# EAGLE board Wannen_Changer (EAGLE 9.6.2)
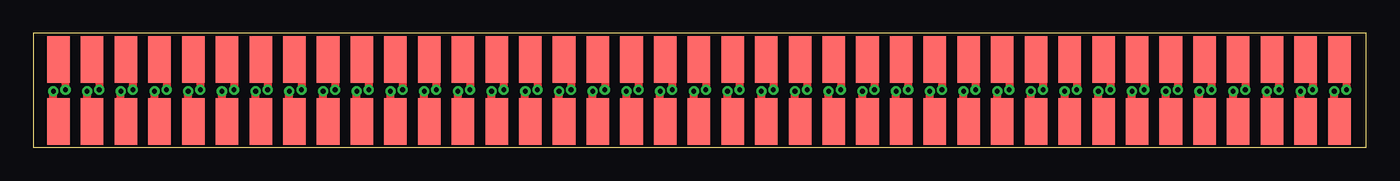
[diagram p0: board, top side]
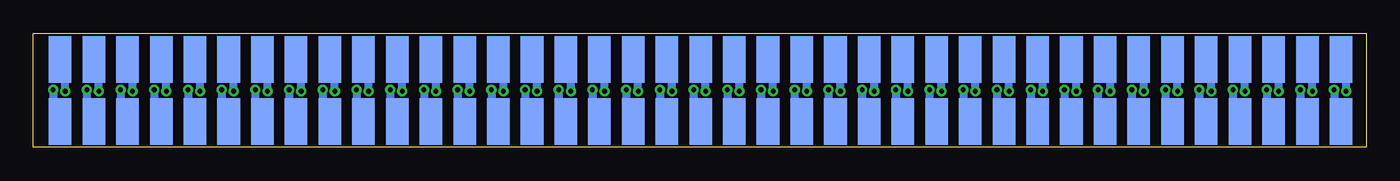
[diagram p1: board, bottom side, seen from below]

Size 100.46 x 8.61 mm. Coordinates in mm from the lower left corner, seen from the top.
Outline: 0,0 100.46,0 100.46,8.61 0,8.61 0,0
Copper layers (1*16): Top 0.035mm / dielectric 1.5mm / Bottom 0.035mm
Design rules "default *": minimum track width 6mil, minimum drill 0.35mm, track to track 6mil, track to pad 6mil, pad to pad 6mil, via to via 6mil, smd to smd 6mil, copper to edge 40mil, drill to drill 6mil, minimum pad ring 10mil, minimum via ring 8mil, stop-mask expansion 4mil, vias tented up to drill 14mil, thermal gap 10mil

## Footprints (pad centres in the part's own frame; a part is rotated, then mirrored left to right if it is on the bottom)
WANNE_D = smd 1.7 x 3.5: 1 0,-6.045 | smd 1.7 x 3.5 bottom: 2 0,-6.045

## Placement (x,y rotation side)
X1  [WANNE_D]  34.93,12.67 0 top
X2  [WANNE_D]  34.93,-4.09 180 bottom
X3  [WANNE_D]  27.3,12.67 0 top
X4  [WANNE_D]  27.3,-4.09 180 bottom
X5  [WANNE_D]  32.39,12.67 0 top
X6  [WANNE_D]  32.39,-4.09 180 bottom
X7  [WANNE_D]  29.84,12.67 0 top
X8  [WANNE_D]  29.84,-4.09 180 bottom
X9  [WANNE_D]  22.22,12.67 0 top
X10  [WANNE_D]  22.22,-4.09 180 bottom
X11  [WANNE_D]  24.76,12.67 0 top
X12  [WANNE_D]  24.76,-4.09 180 bottom
X13  [WANNE_D]  17.14,12.67 0 top
X14  [WANNE_D]  17.14,-4.09 180 bottom
X15  [WANNE_D]  19.68,12.67 0 top
X16  [WANNE_D]  19.68,-4.09 180 bottom
X17  [WANNE_D]  12.06,12.67 0 top
X18  [WANNE_D]  12.06,-4.09 180 bottom
X19  [WANNE_D]  14.61,12.67 0 top
X20  [WANNE_D]  14.61,-4.09 180 bottom
X21  [WANNE_D]  6.99,12.67 0 top
X22  [WANNE_D]  6.99,-4.09 180 bottom
X23  [WANNE_D]  9.53,12.67 0 top
X24  [WANNE_D]  9.53,-4.09 180 bottom
X25  [WANNE_D]  1.91,12.67 0 top
X26  [WANNE_D]  1.91,-4.09 180 bottom
X27  [WANNE_D]  4.45,12.67 0 top
X28  [WANNE_D]  4.45,-4.09 180 bottom
X29  [WANNE_D]  37.47,12.67 0 top
X30  [WANNE_D]  37.47,-4.09 180 bottom
X31  [WANNE_D]  40.01,12.67 0 top
X32  [WANNE_D]  40.01,-4.09 180 bottom
X33  [WANNE_D]  73.02,12.67 0 top
X34  [WANNE_D]  73.02,-4.09 180 bottom
X35  [WANNE_D]  75.56,12.67 0 top
X36  [WANNE_D]  75.56,-4.09 180 bottom
X37  [WANNE_D]  67.94,12.67 0 top
X38  [WANNE_D]  67.94,-4.09 180 bottom
X39  [WANNE_D]  70.48,12.67 0 top
X40  [WANNE_D]  70.48,-4.09 180 bottom
X41  [WANNE_D]  62.87,12.67 0 top
X42  [WANNE_D]  62.87,-4.09 180 bottom
X43  [WANNE_D]  65.41,12.67 0 top
X44  [WANNE_D]  65.41,-4.09 180 bottom
X45  [WANNE_D]  57.79,12.67 0 top
X46  [WANNE_D]  57.79,-4.09 180 bottom
X47  [WANNE_D]  60.33,12.67 0 top
X48  [WANNE_D]  60.33,-4.09 180 bottom
X49  [WANNE_D]  52.71,12.67 0 top
X50  [WANNE_D]  52.71,-4.09 180 bottom
X51  [WANNE_D]  55.25,12.67 0 top
X52  [WANNE_D]  55.25,-4.09 180 bottom
X53  [WANNE_D]  47.62,12.67 0 top
X54  [WANNE_D]  47.62,-4.09 180 bottom
X55  [WANNE_D]  50.16,12.67 0 top
X56  [WANNE_D]  50.16,-4.09 180 bottom
X57  [WANNE_D]  42.55,12.67 0 top
X58  [WANNE_D]  42.55,-4.09 180 bottom
X59  [WANNE_D]  45.09,12.67 0 top
X60  [WANNE_D]  45.09,-4.09 180 bottom
X61  [WANNE_D]  78.1,12.67 0 top
X62  [WANNE_D]  78.1,-4.09 180 bottom
X63  [WANNE_D]  80.64,12.67 0 top
X64  [WANNE_D]  80.64,-4.09 180 bottom
X65  [WANNE_D]  93.34,12.67 0 top
X66  [WANNE_D]  93.34,-4.09 180 bottom
X67  [WANNE_D]  95.88,12.67 0 top
X68  [WANNE_D]  95.88,-4.09 180 bottom
X69  [WANNE_D]  88.27,12.67 0 top
X70  [WANNE_D]  88.27,-4.09 180 bottom
X71  [WANNE_D]  90.8,12.67 0 top
X72  [WANNE_D]  90.8,-4.09 180 bottom
X73  [WANNE_D]  83.18,12.67 0 top
X74  [WANNE_D]  83.18,-4.09 180 bottom
X75  [WANNE_D]  85.72,12.67 0 top
X76  [WANNE_D]  85.72,-4.09 180 bottom
X77  [WANNE_D]  98.42,12.67 0 top
X78  [WANNE_D]  98.42,-4.09 180 bottom

## Library data of the parts
X1-X78 = con-subd

## Nets
N$1: X1.1 X2.1
N$2: X1.2 X2.2
N$3: X3.1 X4.1
N$4: X3.2 X4.2
N$5: X5.1 X6.1
N$6: X5.2 X6.2
N$7: X7.1 X8.1
N$8: X7.2 X8.2
N$9: X9.1 X10.1
N$10: X9.2 X10.2
N$11: X11.1 X12.1
N$12: X11.2 X12.2
N$13: X13.1 X14.1
N$14: X13.2 X14.2
N$15: X15.1 X16.1
N$16: X15.2 X16.2
N$17: X17.1 X18.1
N$18: X17.2 X18.2
N$19: X19.1 X20.1
N$20: X19.2 X20.2
N$21: X21.1 X22.1
N$22: X21.2 X22.2
N$23: X23.1 X24.1
N$24: X23.2 X24.2
N$25: X25.1 X26.1
N$26: X25.2 X26.2
N$27: X27.1 X28.1
N$28: X27.2 X28.2
N$29: X29.1 X30.1
N$30: X29.2 X30.2
N$31: X31.1 X32.1
N$32: X31.2 X32.2
N$33: X33.1 X34.1
N$34: X33.2 X34.2
N$35: X35.1 X36.1
N$36: X35.2 X36.2
N$37: X37.1 X38.1
N$38: X37.2 X38.2
N$39: X39.1 X40.1
N$40: X39.2 X40.2
N$41: X41.1 X42.1
N$42: X41.2 X42.2
N$43: X43.1 X44.1
N$44: X43.2 X44.2
N$45: X45.1 X46.1
N$46: X45.2 X46.2
N$47: X47.1 X48.1
N$48: X47.2 X48.2
N$49: X49.1 X50.1
N$50: X49.2 X50.2
N$51: X51.1 X52.1
N$52: X51.2 X52.2
N$53: X53.1 X54.1
N$54: X53.2 X54.2
N$55: X55.1 X56.1
N$56: X55.2 X56.2
N$57: X57.1 X58.1
N$58: X57.2 X58.2
N$59: X59.1 X60.1
N$60: X59.2 X60.2
N$61: X61.1 X62.1
N$62: X61.2 X62.2
N$63: X63.1 X64.1
N$64: X63.2 X64.2
N$65: X65.1 X66.1
N$66: X65.2 X66.2
N$67: X67.1 X68.1
N$68: X67.2 X68.2
N$69: X69.1 X70.1
N$70: X69.2 X70.2
N$71: X71.1 X72.1
N$72: X71.2 X72.2
N$73: X73.1 X74.1
N$74: X73.2 X74.2
N$75: X75.1 X76.1
N$76: X75.2 X76.2
N$77: X77.1 X78.1
N$78: X77.2 X78.2

## Tracks (layer width: path | path; a pad name or v marks a point on that pad's centre or on a via)
N$1  (via drill 0.35)
  Top 0.305: X1.1 35.45,6.1
  Top 0.61: 35.45,6.1 v35.45,4.35
  Bottom 0.305: 35.45,2.48 X2.1
  Bottom 0.61: v35.45,4.35 35.45,2.48
N$2  (via drill 0.35)
  Top 0.305: X2.2 34.54,2.34
  Top 0.61: 34.54,2.34 v34.54,4.24
  Bottom 0.305: 34.54,6.25 X1.2
  Bottom 0.61: v34.54,4.24 34.54,6.25
N$3  (via drill 0.35)
  Top 0.305: X3.1 27.83,6.1
  Top 0.61: 27.83,6.1 v27.83,4.35
  Bottom 0.305: 27.83,2.48 X4.1
  Bottom 0.61: v27.83,4.35 27.83,2.48
N$4  (via drill 0.35)
  Top 0.305: X4.2 26.92,2.34
  Top 0.61: 26.92,2.34 v26.92,4.24
  Bottom 0.305: 26.92,6.25 X3.2
  Bottom 0.61: v26.92,4.24 26.92,6.25
N$5  (via drill 0.35)
  Top 0.305: X5.1 32.91,6.1
  Top 0.61: 32.91,6.1 v32.91,4.35
  Bottom 0.305: 32.91,2.48 X6.1
  Bottom 0.61: v32.91,4.35 32.91,2.48
N$6  (via drill 0.35)
  Top 0.305: X6.2 32,2.34
  Top 0.61: 32,2.34 v32,4.24
  Bottom 0.305: 32,6.25 X5.2
  Bottom 0.61: v32,4.24 32,6.25
N$7  (via drill 0.35)
  Top 0.305: X7.1 30.37,6.1
  Top 0.61: 30.37,6.1 v30.37,4.35
  Bottom 0.305: 30.37,2.48 X8.1
  Bottom 0.61: v30.37,4.35 30.37,2.48
N$8  (via drill 0.35)
  Top 0.305: X8.2 29.46,2.34
  Top 0.61: 29.46,2.34 v29.46,4.24
  Bottom 0.305: 29.46,6.25 X7.2
  Bottom 0.61: v29.46,4.24 29.46,6.25
N$9  (via drill 0.35)
  Top 0.305: X9.1 22.75,6.1
  Top 0.61: 22.75,6.1 v22.75,4.35
  Bottom 0.305: 22.75,2.48 X10.1
  Bottom 0.61: v22.75,4.35 22.75,2.48
N$10  (via drill 0.35)
  Top 0.305: X10.2 21.84,2.34
  Top 0.61: 21.84,2.34 v21.84,4.24
  Bottom 0.305: 21.84,6.25 X9.2
  Bottom 0.61: v21.84,4.24 21.84,6.25
N$11  (via drill 0.35)
  Top 0.305: X11.1 25.29,6.1
  Top 0.61: 25.29,6.1 v25.29,4.35
  Bottom 0.305: 25.29,2.48 X12.1
  Bottom 0.61: v25.29,4.35 25.29,2.48
N$12  (via drill 0.35)
  Top 0.305: X12.2 24.38,2.34
  Top 0.61: 24.38,2.34 v24.38,4.24
  Bottom 0.305: 24.38,6.25 X11.2
  Bottom 0.61: v24.38,4.24 24.38,6.25
N$13  (via drill 0.35)
  Top 0.305: X13.1 17.67,6.1
  Top 0.61: 17.67,6.1 v17.67,4.35
  Bottom 0.305: 17.67,2.48 X14.1
  Bottom 0.61: v17.67,4.35 17.67,2.48
N$14  (via drill 0.35)
  Top 0.305: X14.2 16.76,2.34
  Top 0.61: 16.76,2.34 v16.76,4.24
  Bottom 0.305: 16.76,6.25 X13.2
  Bottom 0.61: v16.76,4.24 16.76,6.25
N$15  (via drill 0.35)
  Top 0.305: X15.1 20.21,6.1
  Top 0.61: 20.21,6.1 v20.21,4.35
  Bottom 0.305: 20.21,2.48 X16.1
  Bottom 0.61: v20.21,4.35 20.21,2.48
N$16  (via drill 0.35)
  Top 0.305: X16.2 19.3,2.34
  Top 0.61: 19.3,2.34 v19.3,4.24
  Bottom 0.305: 19.3,6.25 X15.2
  Bottom 0.61: v19.3,4.24 19.3,6.25
N$17  (via drill 0.35)
  Top 0.305: X17.1 12.59,6.1
  Top 0.61: 12.59,6.1 v12.59,4.35
  Bottom 0.305: 12.59,2.48 X18.1
  Bottom 0.61: v12.59,4.35 12.59,2.48
N$18  (via drill 0.35)
  Top 0.305: X18.2 11.68,2.34
  Top 0.61: 11.68,2.34 v11.68,4.24
  Bottom 0.305: 11.68,6.25 X17.2
  Bottom 0.61: v11.68,4.24 11.68,6.25
N$19  (via drill 0.35)
  Top 0.305: X19.1 15.13,6.1
  Top 0.61: 15.13,6.1 v15.13,4.35
  Bottom 0.305: 15.13,2.48 X20.1
  Bottom 0.61: v15.13,4.35 15.13,2.48
N$20  (via drill 0.35)
  Top 0.305: X20.2 14.22,2.34
  Top 0.61: 14.22,2.34 v14.22,4.24
  Bottom 0.305: 14.22,6.25 X19.2
  Bottom 0.61: v14.22,4.24 14.22,6.25
N$21  (via drill 0.35)
  Top 0.305: X21.1 7.51,6.1
  Top 0.61: 7.51,6.1 v7.51,4.35
  Bottom 0.305: 7.51,2.48 X22.1
  Bottom 0.61: v7.51,4.35 7.51,2.48
N$22  (via drill 0.35)
  Top 0.305: X22.2 6.6,2.34
  Top 0.61: 6.6,2.34 v6.6,4.24
  Bottom 0.305: 6.6,6.25 X21.2
  Bottom 0.61: v6.6,4.24 6.6,6.25
N$23  (via drill 0.35)
  Top 0.305: X23.1 10.05,6.1
  Top 0.61: 10.05,6.1 v10.05,4.35
  Bottom 0.305: 10.05,2.48 X24.1
  Bottom 0.61: v10.05,4.35 10.05,2.48
N$24  (via drill 0.35)
  Top 0.305: X24.2 9.14,2.34
  Top 0.61: 9.14,2.34 v9.14,4.24
  Bottom 0.305: 9.14,6.25 X23.2
  Bottom 0.61: v9.14,4.24 9.14,6.25
N$25  (via drill 0.35)
  Top 0.305: X25.1 2.43,6.1
  Top 0.61: 2.43,6.1 v2.43,4.35
  Bottom 0.305: 2.43,2.48 X26.1
  Bottom 0.61: v2.43,4.35 2.43,2.48
N$26  (via drill 0.35)
  Top 0.305: X26.2 1.52,2.34
  Top 0.61: 1.52,2.34 v1.52,4.24
  Bottom 0.305: 1.52,6.25 X25.2
  Bottom 0.61: v1.52,4.24 1.52,6.25
N$27  (via drill 0.35)
  Top 0.305: X27.1 4.97,6.1
  Top 0.61: 4.97,6.1 v4.97,4.35
  Bottom 0.305: 4.97,2.48 X28.1
  Bottom 0.61: v4.97,4.35 4.97,2.48
N$28  (via drill 0.35)
  Top 0.305: X28.2 4.06,2.34
  Top 0.61: 4.06,2.34 v4.06,4.24
  Bottom 0.305: 4.06,6.25 X27.2
  Bottom 0.61: v4.06,4.24 4.06,6.25
N$29  (via drill 0.35)
  Top 0.305: X29.1 37.99,6.1
  Top 0.61: 37.99,6.1 v37.99,4.35
  Bottom 0.305: 37.99,2.48 X30.1
  Bottom 0.61: v37.99,4.35 37.99,2.48
N$30  (via drill 0.35)
  Top 0.305: X30.2 37.08,2.34
  Top 0.61: 37.08,2.34 v37.08,4.24
  Bottom 0.305: 37.08,6.25 X29.2
  Bottom 0.61: v37.08,4.24 37.08,6.25
N$31  (via drill 0.35)
  Top 0.305: X31.1 40.53,6.1
  Top 0.61: 40.53,6.1 v40.53,4.35
  Bottom 0.305: 40.53,2.48 X32.1
  Bottom 0.61: v40.53,4.35 40.53,2.48
N$32  (via drill 0.35)
  Top 0.305: X32.2 39.62,2.34
  Top 0.61: 39.62,2.34 v39.62,4.24
  Bottom 0.305: 39.62,6.25 X31.2
  Bottom 0.61: v39.62,4.24 39.62,6.25
N$33  (via drill 0.35)
  Top 0.305: X33.1 73.55,6.1
  Top 0.61: 73.55,6.1 v73.55,4.35
  Bottom 0.305: 73.55,2.48 X34.1
  Bottom 0.61: v73.55,4.35 73.55,2.48
N$34  (via drill 0.35)
  Top 0.305: X34.2 72.64,2.34
  Top 0.61: 72.64,2.34 v72.64,4.24
  Bottom 0.305: 72.64,6.25 X33.2
  Bottom 0.61: v72.64,4.24 72.64,6.25
N$35  (via drill 0.35)
  Top 0.305: X35.1 76.09,6.1
  Top 0.61: 76.09,6.1 v76.09,4.35
  Bottom 0.305: 76.09,2.48 X36.1
  Bottom 0.61: v76.09,4.35 76.09,2.48
N$36  (via drill 0.35)
  Top 0.305: X36.2 75.18,2.34
  Top 0.61: 75.18,2.34 v75.18,4.24
  Bottom 0.305: 75.18,6.25 X35.2
  Bottom 0.61: v75.18,4.24 75.18,6.25
N$37  (via drill 0.35)
  Top 0.305: X37.1 68.47,6.1
  Top 0.61: 68.47,6.1 v68.47,4.35
  Bottom 0.305: 68.47,2.48 X38.1
  Bottom 0.61: v68.47,4.35 68.47,2.48
N$38  (via drill 0.35)
  Top 0.305: X38.2 67.56,2.34
  Top 0.61: 67.56,2.34 v67.56,4.24
  Bottom 0.305: 67.56,6.25 X37.2
  Bottom 0.61: v67.56,4.24 67.56,6.25
N$39  (via drill 0.35)
  Top 0.305: X39.1 71.01,6.1
  Top 0.61: 71.01,6.1 v71.01,4.35
  Bottom 0.305: 71.01,2.48 X40.1
  Bottom 0.61: v71.01,4.35 71.01,2.48
N$40  (via drill 0.35)
  Top 0.305: X40.2 70.1,2.34
  Top 0.61: 70.1,2.34 v70.1,4.24
  Bottom 0.305: 70.1,6.25 X39.2
  Bottom 0.61: v70.1,4.24 70.1,6.25
N$41  (via drill 0.35)
  Top 0.305: X41.1 63.39,6.1
  Top 0.61: 63.39,6.1 v63.39,4.35
  Bottom 0.305: 63.39,2.48 X42.1
  Bottom 0.61: v63.39,4.35 63.39,2.48
N$42  (via drill 0.35)
  Top 0.305: X42.2 62.48,2.34
  Top 0.61: 62.48,2.34 v62.48,4.24
  Bottom 0.305: 62.48,6.25 X41.2
  Bottom 0.61: v62.48,4.24 62.48,6.25
N$43  (via drill 0.35)
  Top 0.305: X43.1 65.93,6.1
  Top 0.61: 65.93,6.1 v65.93,4.35
  Bottom 0.305: 65.93,2.48 X44.1
  Bottom 0.61: v65.93,4.35 65.93,2.48
N$44  (via drill 0.35)
  Top 0.305: X44.2 65.02,2.34
  Top 0.61: 65.02,2.34 v65.02,4.24
  Bottom 0.305: 65.02,6.25 X43.2
  Bottom 0.61: v65.02,4.24 65.02,6.25
N$45  (via drill 0.35)
  Top 0.305: X45.1 58.31,6.1
  Top 0.61: 58.31,6.1 v58.31,4.35
  Bottom 0.305: 58.31,2.48 X46.1
  Bottom 0.61: v58.31,4.35 58.31,2.48
N$46  (via drill 0.35)
  Top 0.305: X46.2 57.4,2.34
  Top 0.61: 57.4,2.34 v57.4,4.24
  Bottom 0.305: 57.4,6.25 X45.2
  Bottom 0.61: v57.4,4.24 57.4,6.25
N$47  (via drill 0.35)
  Top 0.305: X47.1 60.85,6.1
  Top 0.61: 60.85,6.1 v60.85,4.35
  Bottom 0.305: 60.85,2.48 X48.1
  Bottom 0.61: v60.85,4.35 60.85,2.48
N$48  (via drill 0.35)
  Top 0.305: X48.2 59.94,2.34
  Top 0.61: 59.94,2.34 v59.94,4.24
  Bottom 0.305: 59.94,6.25 X47.2
  Bottom 0.61: v59.94,4.24 59.94,6.25
N$49  (via drill 0.35)
  Top 0.305: X49.1 53.23,6.1
  Top 0.61: 53.23,6.1 v53.23,4.35
  Bottom 0.305: 53.23,2.48 X50.1
  Bottom 0.61: v53.23,4.35 53.23,2.48
N$50  (via drill 0.35)
  Top 0.305: X50.2 52.32,2.34
  Top 0.61: 52.32,2.34 v52.32,4.24
  Bottom 0.305: 52.32,6.25 X49.2
  Bottom 0.61: v52.32,4.24 52.32,6.25
N$51  (via drill 0.35)
  Top 0.305: X51.1 55.77,6.1
  Top 0.61: 55.77,6.1 v55.77,4.35
  Bottom 0.305: 55.77,2.48 X52.1
  Bottom 0.61: v55.77,4.35 55.77,2.48
N$52  (via drill 0.35)
  Top 0.305: X52.2 54.86,2.34
  Top 0.61: 54.86,2.34 v54.86,4.24
  Bottom 0.305: 54.86,6.25 X51.2
  Bottom 0.61: v54.86,4.24 54.86,6.25
N$53  (via drill 0.35)
  Top 0.305: X53.1 48.15,6.1
  Top 0.61: 48.15,6.1 v48.15,4.35
  Bottom 0.305: 48.15,2.48 X54.1
  Bottom 0.61: v48.15,4.35 48.15,2.48
N$54  (via drill 0.35)
  Top 0.305: X54.2 47.24,2.34
  Top 0.61: 47.24,2.34 v47.24,4.24
  Bottom 0.305: 47.24,6.25 X53.2
  Bottom 0.61: v47.24,4.24 47.24,6.25
N$55  (via drill 0.35)
  Top 0.305: X55.1 50.69,6.1
  Top 0.61: 50.69,6.1 v50.69,4.35
  Bottom 0.305: 50.69,2.48 X56.1
  Bottom 0.61: v50.69,4.35 50.69,2.48
N$56  (via drill 0.35)
  Top 0.305: X56.2 49.78,2.34
  Top 0.61: 49.78,2.34 v49.78,4.24
  Bottom 0.305: 49.78,6.25 X55.2
  Bottom 0.61: v49.78,4.24 49.78,6.25
N$57  (via drill 0.35)
  Top 0.305: X57.1 43.07,6.1
  Top 0.61: 43.07,6.1 v43.07,4.35
  Bottom 0.305: 43.07,2.48 X58.1
  Bottom 0.61: v43.07,4.35 43.07,2.48
N$58  (via drill 0.35)
  Top 0.305: X58.2 42.16,2.34
  Top 0.61: 42.16,2.34 v42.16,4.24
  Bottom 0.305: 42.16,6.25 X57.2
  Bottom 0.61: v42.16,4.24 42.16,6.25
N$59  (via drill 0.35)
  Top 0.305: X59.1 45.61,6.1
  Top 0.61: 45.61,6.1 v45.61,4.35
  Bottom 0.305: 45.61,2.48 X60.1
  Bottom 0.61: v45.61,4.35 45.61,2.48
N$60  (via drill 0.35)
  Top 0.305: X60.2 44.7,2.34
  Top 0.61: 44.7,2.34 v44.7,4.24
  Bottom 0.305: 44.7,6.25 X59.2
  Bottom 0.61: v44.7,4.24 44.7,6.25
N$61  (via drill 0.35)
  Top 0.305: X61.1 78.63,6.1
  Top 0.61: 78.63,6.1 v78.63,4.35
  Bottom 0.305: 78.63,2.48 X62.1
  Bottom 0.61: v78.63,4.35 78.63,2.48
N$62  (via drill 0.35)
  Top 0.305: X62.2 77.72,2.34
  Top 0.61: 77.72,2.34 v77.72,4.24
  Bottom 0.305: 77.72,6.25 X61.2
  Bottom 0.61: v77.72,4.24 77.72,6.25
N$63  (via drill 0.35)
  Top 0.305: X63.1 81.17,6.1
  Top 0.61: 81.17,6.1 v81.17,4.35
  Bottom 0.305: 81.17,2.48 X64.1
  Bottom 0.61: v81.17,4.35 81.17,2.48
N$64  (via drill 0.35)
  Top 0.305: X64.2 80.26,2.34
  Top 0.61: 80.26,2.34 v80.26,4.24
  Bottom 0.305: 80.26,6.25 X63.2
  Bottom 0.61: v80.26,4.24 80.26,6.25
N$65  (via drill 0.35)
  Top 0.305: X65.1 93.87,6.1
  Top 0.61: 93.87,6.1 v93.87,4.35
  Bottom 0.305: 93.87,2.48 X66.1
  Bottom 0.61: v93.87,4.35 93.87,2.48
N$66  (via drill 0.35)
  Top 0.305: X66.2 92.96,2.34
  Top 0.61: 92.96,2.34 v92.96,4.24
  Bottom 0.305: 92.96,6.25 X65.2
  Bottom 0.61: v92.96,4.24 92.96,6.25
N$67  (via drill 0.35)
  Top 0.305: X67.1 96.41,6.1
  Top 0.61: 96.41,6.1 v96.41,4.35
  Bottom 0.305: 96.41,2.48 X68.1
  Bottom 0.61: v96.41,4.35 96.41,2.48
N$68  (via drill 0.35)
  Top 0.305: X68.2 95.5,2.34
  Top 0.61: 95.5,2.34 v95.5,4.24
  Bottom 0.305: 95.5,6.25 X67.2
  Bottom 0.61: v95.5,4.24 95.5,6.25
N$69  (via drill 0.35)
  Top 0.305: X69.1 88.79,6.1
  Top 0.61: 88.79,6.1 v88.79,4.35
  Bottom 0.305: 88.79,2.48 X70.1
  Bottom 0.61: v88.79,4.35 88.79,2.48
N$70  (via drill 0.35)
  Top 0.305: X70.2 87.88,2.34
  Top 0.61: 87.88,2.34 v87.88,4.24
  Bottom 0.305: 87.88,6.25 X69.2
  Bottom 0.61: v87.88,4.24 87.88,6.25
N$71  (via drill 0.35)
  Top 0.305: X71.1 91.33,6.1
  Top 0.61: 91.33,6.1 v91.33,4.35
  Bottom 0.305: 91.33,2.48 X72.1
  Bottom 0.61: v91.33,4.35 91.33,2.48
N$72  (via drill 0.35)
  Top 0.305: X72.2 90.42,2.34
  Top 0.61: 90.42,2.34 v90.42,4.24
  Bottom 0.305: 90.42,6.25 X71.2
  Bottom 0.61: v90.42,4.24 90.42,6.25
N$73  (via drill 0.35)
  Top 0.305: X73.1 83.71,6.1
  Top 0.61: 83.71,6.1 v83.71,4.35
  Bottom 0.305: 83.71,2.48 X74.1
  Bottom 0.61: v83.71,4.35 83.71,2.48
N$74  (via drill 0.35)
  Top 0.305: X74.2 82.8,2.34
  Top 0.61: 82.8,2.34 v82.8,4.24
  Bottom 0.305: 82.8,6.25 X73.2
  Bottom 0.61: v82.8,4.24 82.8,6.25
N$75  (via drill 0.35)
  Top 0.305: X75.1 86.25,6.1
  Top 0.61: 86.25,6.1 v86.25,4.35
  Bottom 0.305: 86.25,2.48 X76.1
  Bottom 0.61: v86.25,4.35 86.25,2.48
N$76  (via drill 0.35)
  Top 0.305: X76.2 85.34,2.34
  Top 0.61: 85.34,2.34 v85.34,4.24
  Bottom 0.305: 85.34,6.25 X75.2
  Bottom 0.61: v85.34,4.24 85.34,6.25
N$77  (via drill 0.35)
  Top 0.305: X77.1 98.95,6.1
  Top 0.61: 98.95,6.1 v98.95,4.35
  Bottom 0.305: 98.95,2.48 X78.1
  Bottom 0.61: v98.95,4.35 98.95,2.48
N$78  (via drill 0.35)
  Top 0.305: X78.2 98.04,2.34
  Top 0.61: 98.04,2.34 v98.04,4.24
  Bottom 0.305: 98.04,6.25 X77.2
  Bottom 0.61: v98.04,4.24 98.04,6.25